# Altium PCB Frontend.PcbDoc
Units mm, origin at the board's own origin, x right, y up, seen from the top; angles counter-clockwise.
Board outline 50 x 80 mm, 4 copper layers (Top Layer, Mid Layer 1, Mid Layer 2, Bottom Layer), stack 1.57 mm thick; 49 components, 38 nets, 189 pads, 418 vias.
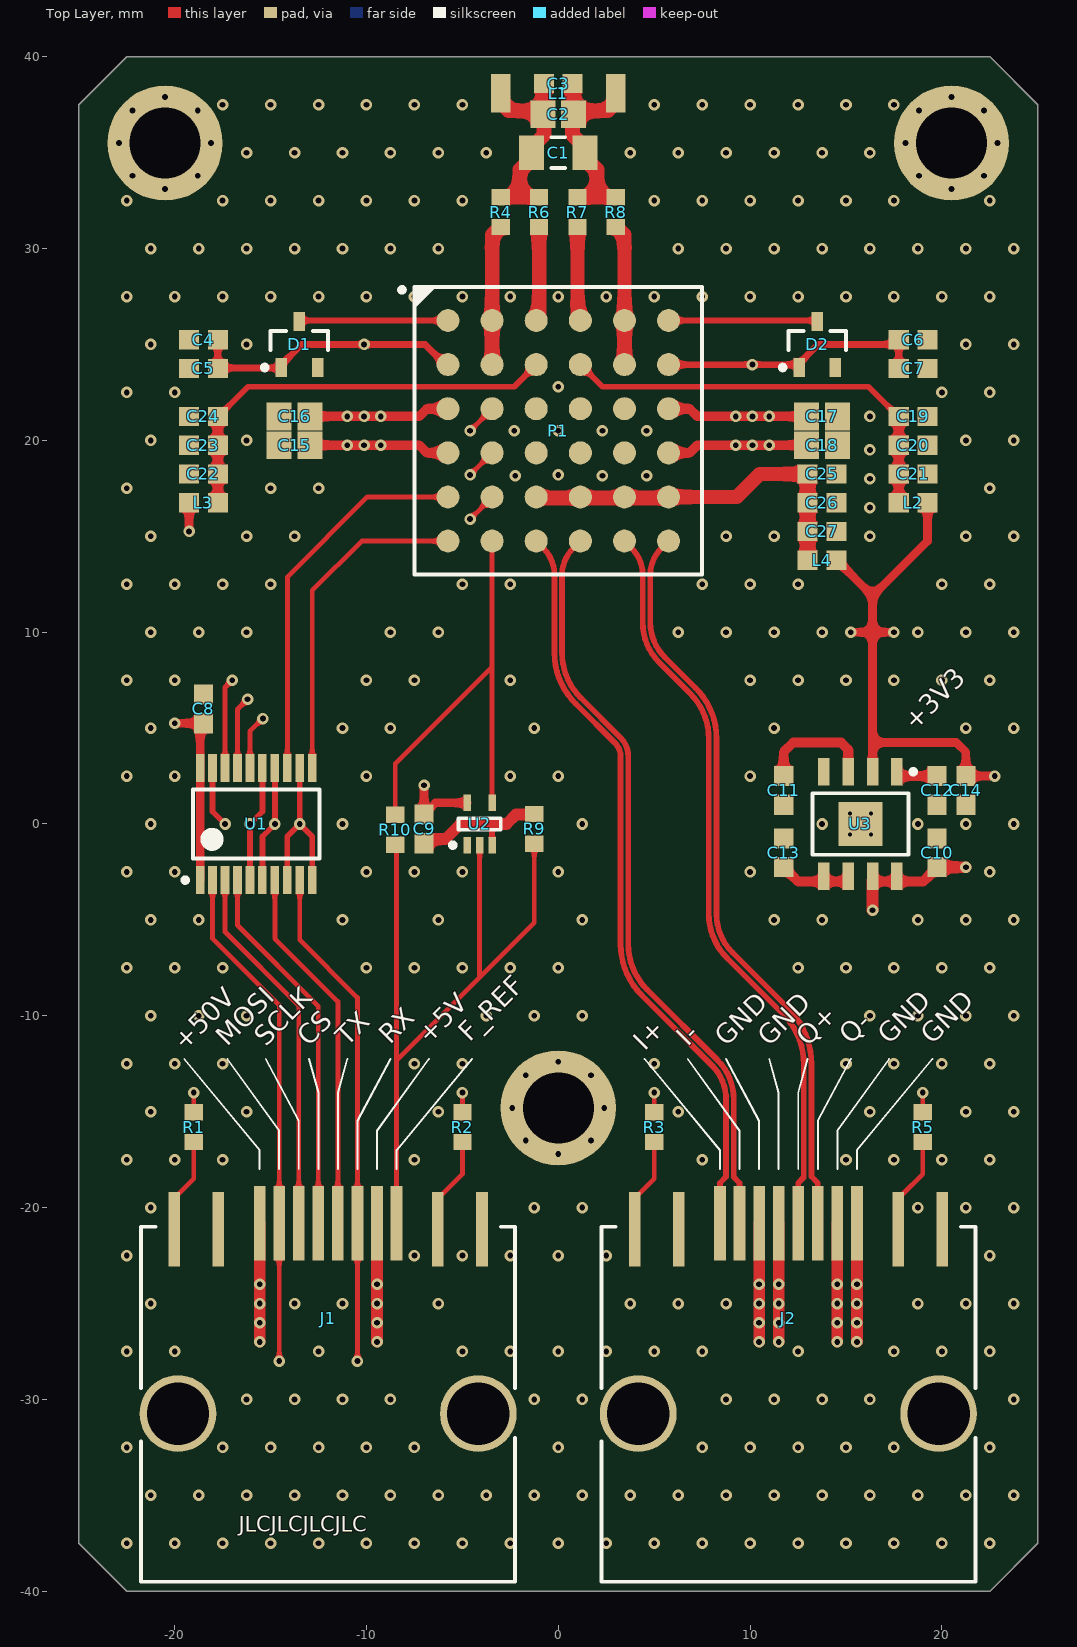
[diagram p0: Top Layer view]
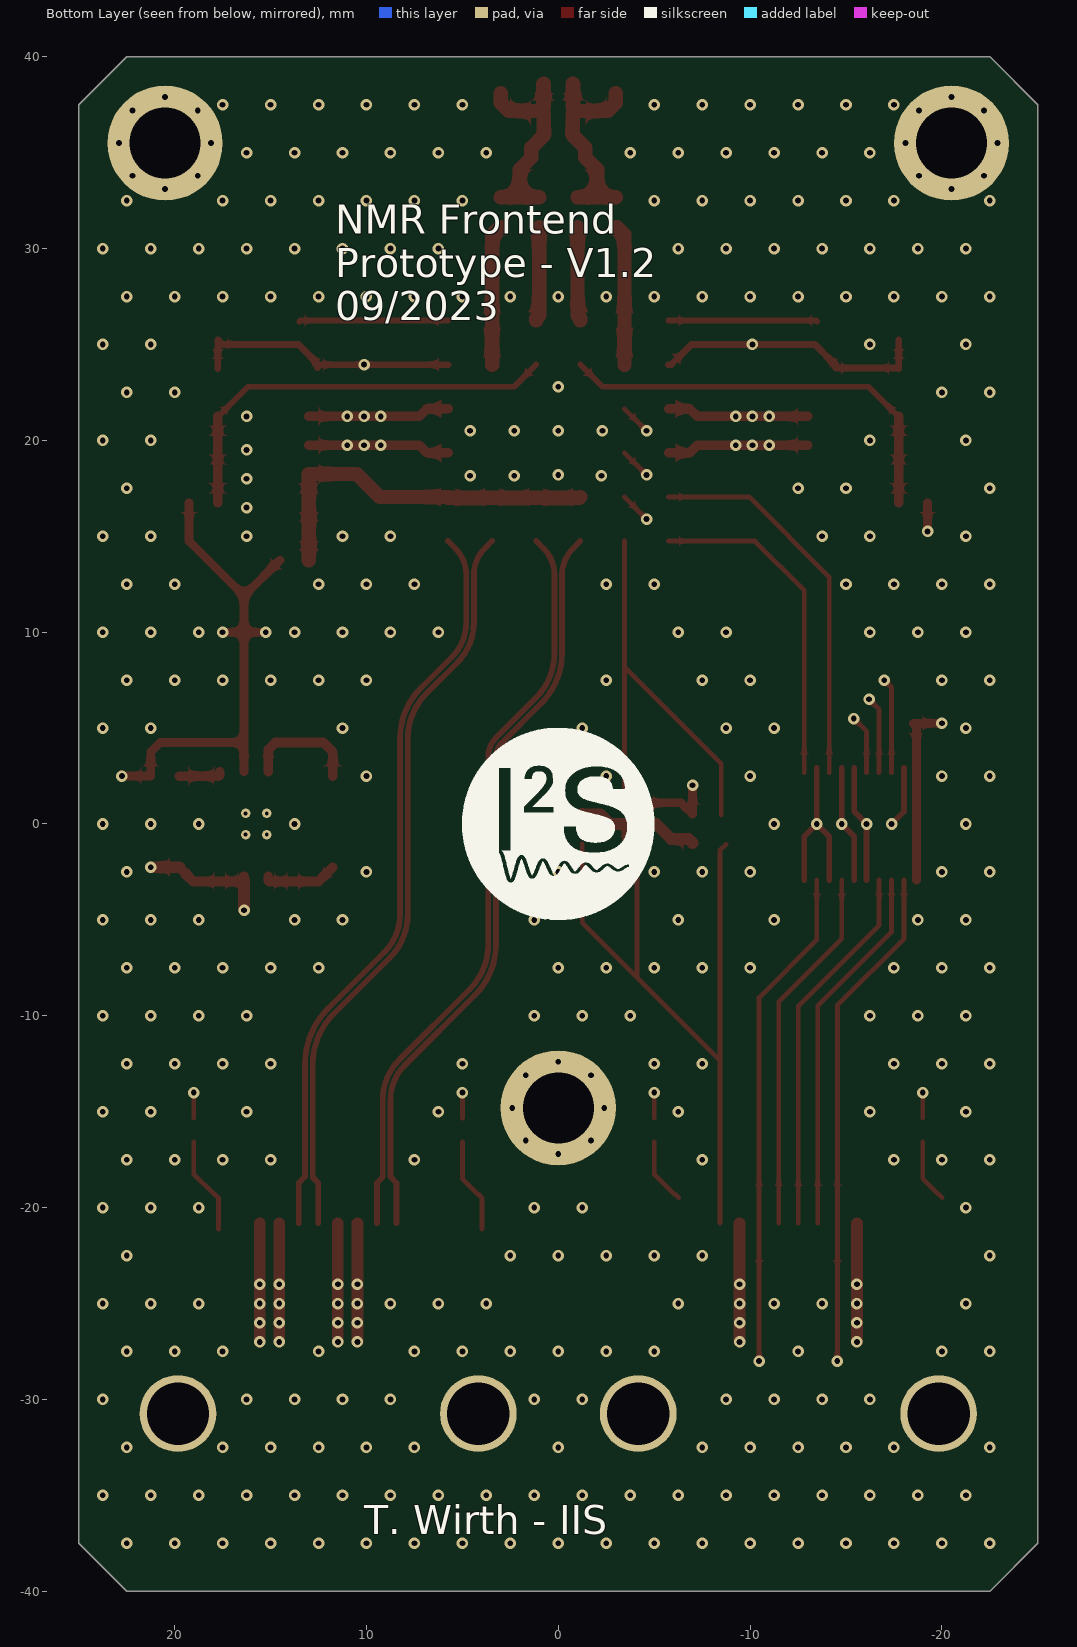
[diagram p1: Bottom Layer view, seen from below]
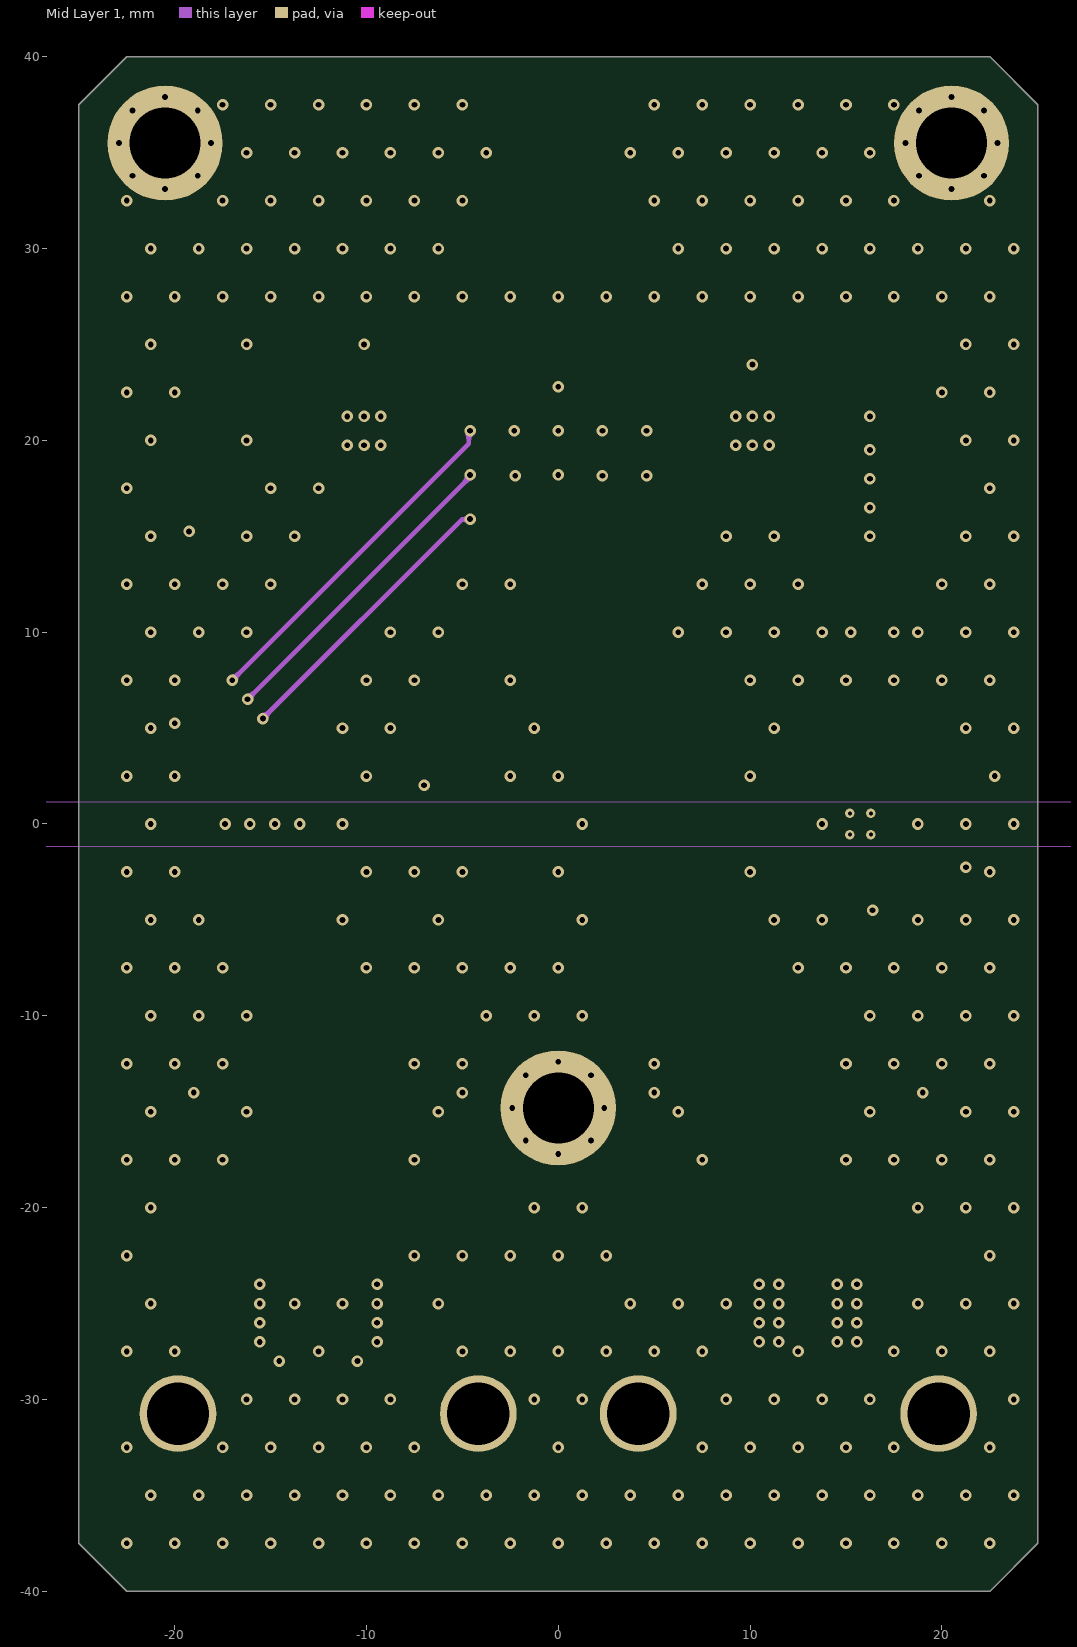
[diagram p2: Mid Layer 1]
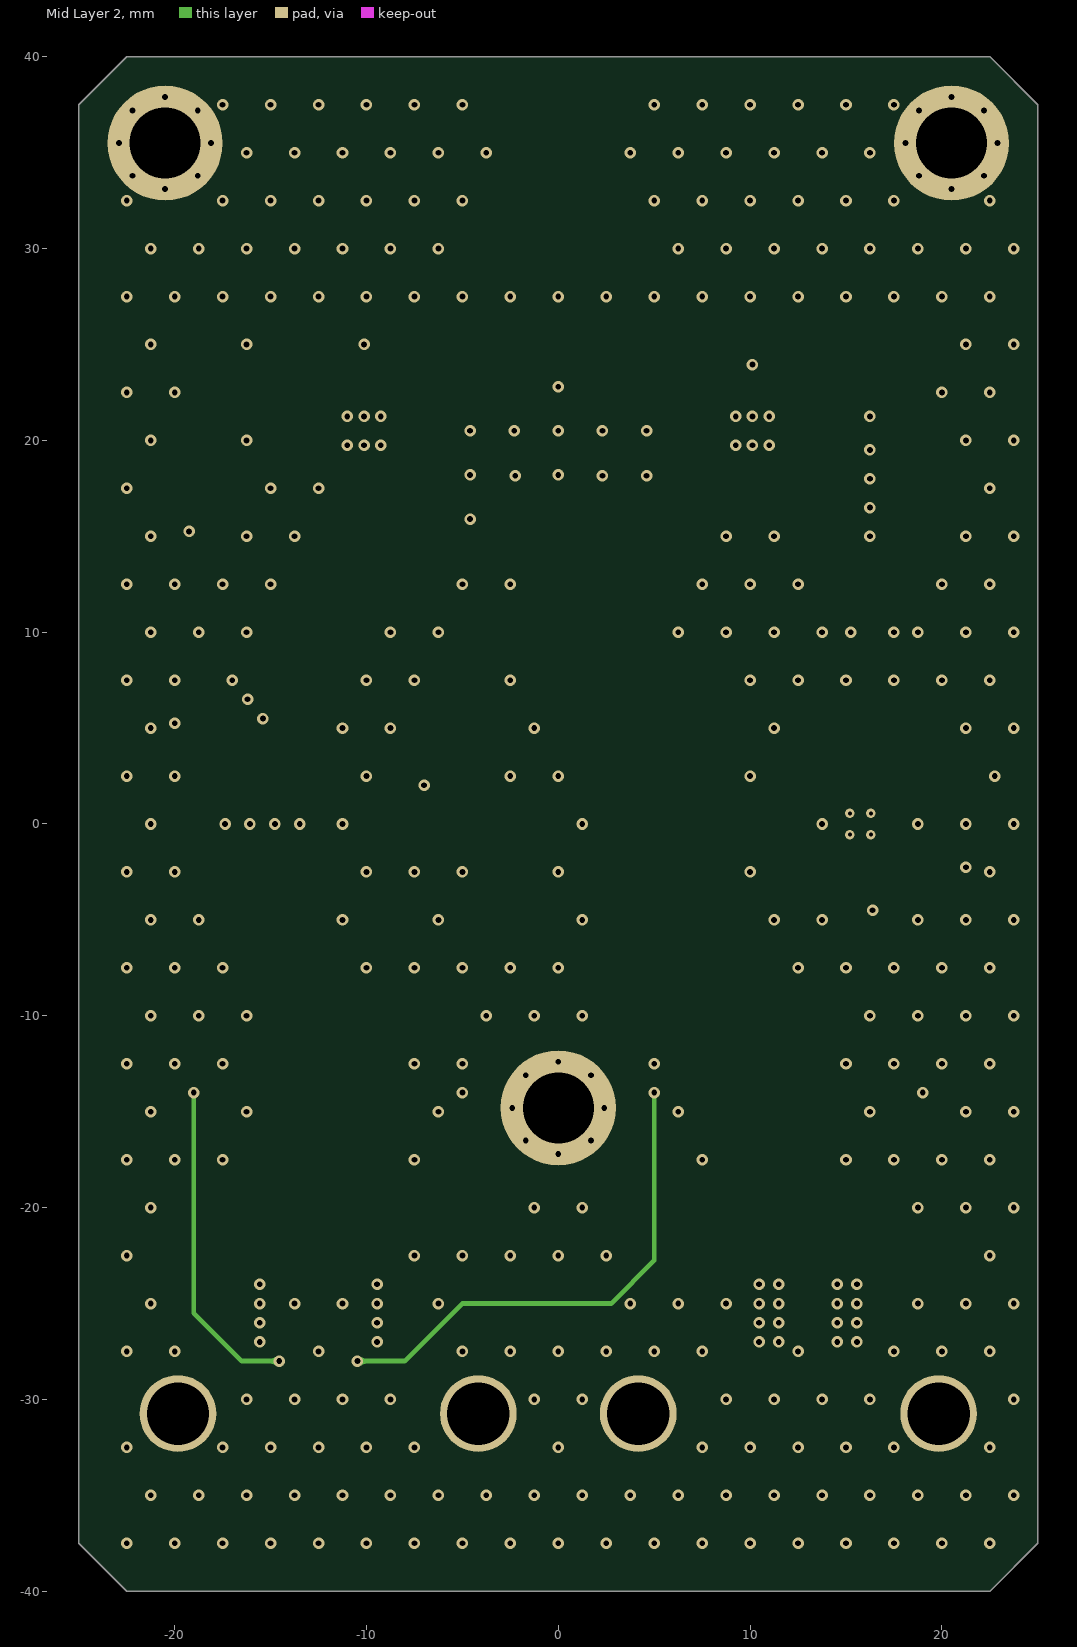
[diagram p3: Mid Layer 2]
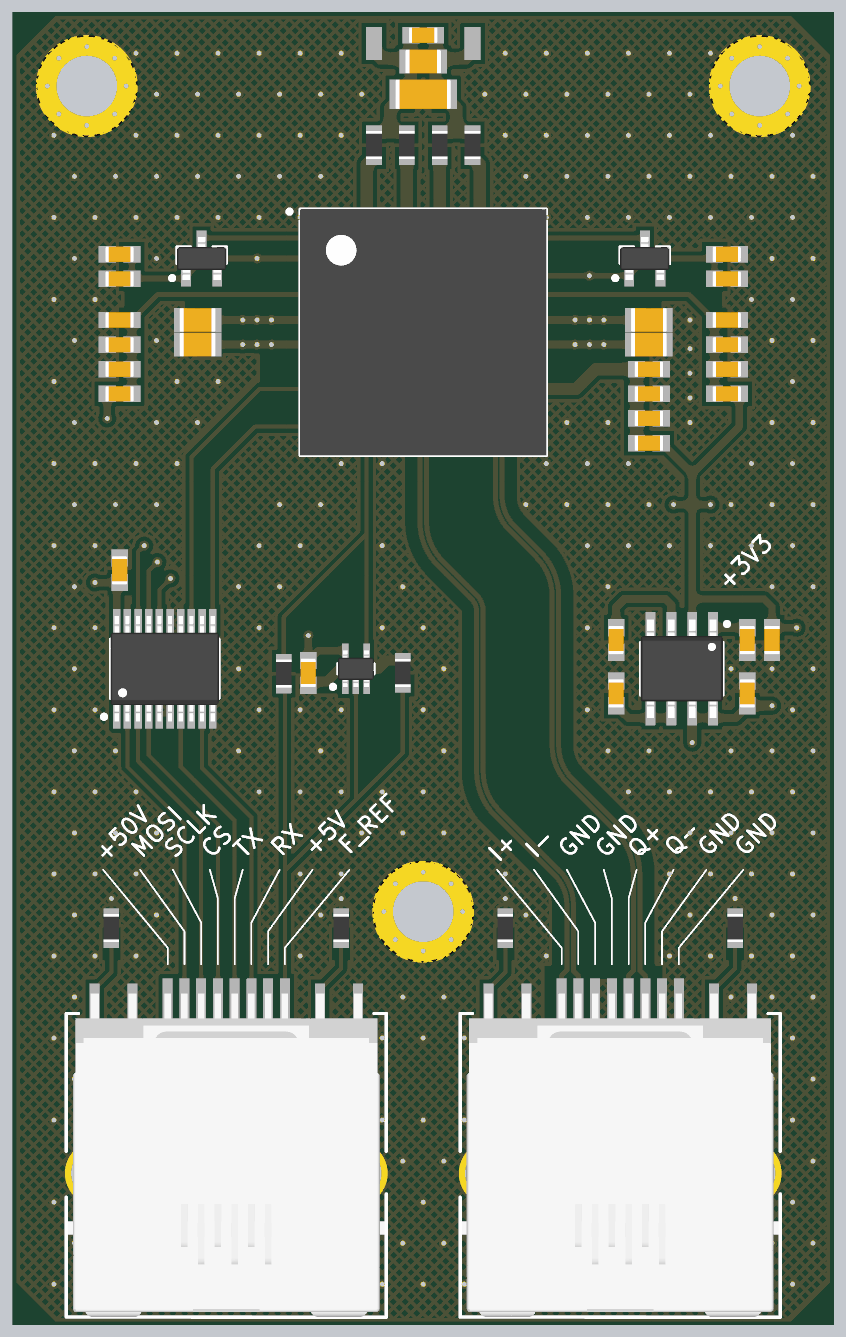
[diagram p4: 3D render of the assembled board from above, using the file's embedded part models]

## Layer stack, top to bottom
Top Solder: solder mask 0.0127, Solder Resist, Dk 3.8
Top Layer: signal copper 0.035
Dielectric 1: prepreg 0.1, 2313, Dk 4.05
Mid Layer 1: signal copper 0.0175
Core: core 1.265, FR-4, Dk 4.5
Mid Layer 2: signal copper 0.0175
Dielectric 2: prepreg 0.1, 2313, Dk 4.05
Bottom Layer: signal copper 0.035
Bottom Solder: solder mask 0.0127, Solder Resist, Dk 3.8

## Board outline
-25,-37.5 -22.5,-40 22.5,-40 25,-37.5 25,37.5 22.5,40 -22.5,40 -25,37.5

## Design rules (kind name [scope] priority, off if disabled: settings)
BoardOutlineClearance [All] p1: gap=0.2 ignorepadtopadclearanceinfootprint=FALSE
Clearance Clearance_IQ [InNetClass('IQ')] p1: gap=0.102 ignorepadtopadclearanceinfootprint=FALSE except(0.09: Arc-Arc Arc-Track Track-Track; 0.127: SMDPad-SMDPad THPad-Via Via-Fill Via-Region Via-Text; 0.2: Arc-SMDPad Track-SMDPad; 0.254: Arc-Via Arc-Hole Track-Via Track-Hole SMDPad-Via SMDPad-Hole THPad-Hole Via-Via Via-Hole Fill-Hole Poly-Hole Region-Hole Text-Hole; 0.33: Arc-THPad Track-THPad SMDPad-THPad THPad-THPad; 0.75: Arc-Poly Track-Poly SMDPad-Poly THPad-Poly Via-Poly Fill-Poly Poly-Poly)
Clearance [All] p2: gap=0.102 ignorepadtopadclearanceinfootprint=FALSE except(0.09: Arc-Arc Arc-Track Track-Track; 0.127: SMDPad-SMDPad THPad-Via Via-Fill Via-Region Via-Text; 0.2: Arc-SMDPad Track-SMDPad; 0.25: Arc-Poly Track-Poly SMDPad-Poly THPad-Poly Via-Poly Fill-Poly Poly-Poly; 0.254: Arc-Via Arc-Hole Track-Via Track-Hole SMDPad-Via SMDPad-Hole THPad-Hole Via-Via Via-Hole Fill-Hole Poly-Hole Region-Hole Text-Hole; 0.33: Arc-THPad Track-THPad SMDPad-THPad THPad-THPad)
ComponentClearance [All] p1: gap=0.102 collisioncheckmode=3 verticalgap=0.102 showdistances=TRUE
DiffPairsRouting [InDifferentialPairClass('IQ')] p1: maxlimit=2 minlimit=0.09 mostfreqgap=0.1 toplayer_minwidth=0.09 toplayer_maxwidth=6 toplayer_prefwidth=0.3 midlayer1_minwidth=0.09 midlayer1_maxwidth=6 midlayer1_prefwidth=0.3 midlayer2_minwidth=0.09 midlayer2_maxwidth=6 midlayer2_prefwidth=0.3 bottomlayer_minwidth=0.09 bottomlayer_maxwidth=6 bottomlayer_prefwidth=0.3 maxuncoupledlength=12.7
Height [All] p1: minheight=0 maxheight=1816.048 prefheight=12.7
HoleSize [All] p1: absolutevalues=TRUE maxlimit=6.3 minlimit=0.2 maxpercent=80.000 minpercent=20.000
HoleToHoleClearance [All] p1: gap=0.5 allowstackedmicrovias=FALSE
MinimumAnnularRing [All] p1: minimumring=0.13
MinimumSolderMaskSliver [All] p1: minsoldermaskwidth=0.13
PlaneClearance [All] p1: clearance=0.102
PlaneConnect PlaneConnectPowerPads [InPadClass('PowerPads')] p1: planeconnectstyle=Direct reliefexpansion=0.508 reliefentries=4 reliefconductorwidth=0.254 reliefairgap=0.254
PlaneConnect [All] p2: pad.planeconnectstyle=Relief pad.reliefexpansion=0.3 pad.reliefentries=4 pad.reliefconductorwidth=0.102 pad.reliefairgap=0.102 via.planeconnectstyle=Direct via.reliefexpansion=0.3 via.reliefentries=4 via.reliefconductorwidth=0.127 via.reliefairgap=0.127
PolygonConnect PolygonConnectPowerPads [All vs (InPadClass('PowerPads'))] p1: connectstyle=Direct reliefconductorwidth=0.254 reliefentries=4 polygonreliefangle="90 Angle" airgapwidth=0.254
PolygonConnect [All] p2: connectstyle=Direct reliefconductorwidth=0.102 reliefentries=4 polygonreliefangle="90 Angle" airgapwidth=0.102
RoutingVias [All] p1: holewidth=0.3 width=0.45 viastyle="Through Hole" minholewidth=0.15 minwidth=0.25 maxholewidth=6.3 maxwidth=6.55
SilkToSilkClearance [All] p1: silktosilkclearance=0.15
SilkToSolderMaskClearance [IsPad] p1: minsilkscreentomaskgap=0.15 clearancetoexposedcopper=TRUE
SolderMaskExpansion [All] p1: expansion=0 istentingtop=FALSE
Width [All] p1: maxlimit=1816.048 minlimit=0.09 preferedwidth=0.102
20 further rules are at their usual default settings.

## Classes and differential pairs
differential pair class IQ: I Q
net class IQ: I_N I_P Q_N Q_P
component class Power: C10 C11 C12 C13 C14 C15 C16 C17 C18 C19 C20 C21 C22 C23 C24 C25 C26 C27 L2 L3 L4 U3
component class Frontend: C1 C2 C3 C4 C5 C6 C7 C8 C9 D1 D2 J1 J2 L1 P1 R1 R2 R3 R4 R5 R6 R7 R8 R9 R10 U1 U2
differential pair Q: +Q_P -Q_N
differential pair I: +I_P -I_N

## Components (designator, comment, footprint, x,y, rotation, side; value= is the part's Value field where it differs from the comment)
C1 "tune" CAP_1206 0,35 r0 top
C2 "tune" CAP_0805 0,37 r0 top
C3 "tune" CAP_0603 0,38.6 r0 top
C4 "100n" CAP_0603 -18.5,25.25 r180 top
C5 "100p" CAP_0603 -18.5,23.75 r180 top
C6 "100n" CAP_0603 18.5,25.25 r0 top
C7 "100p" CAP_0603 18.5,23.75 r0 top
C8 "100n" CAP_0603 -18.5,6 r90 top
C9 "100n" CAP_0603 -7,-0.25 r270 top
C10 "10u" CAP_0603 19.75,-1.5 r90 top
C11 "22u / 10u" CAP_0603 11.75,1.75 r270 top
C12 "10u" CAP_0603 19.75,1.75 r270 top
C13 "10u" CAP_0603 11.75,-1.5 r90 top
C14 "10u" CAP_0603 21.25,1.75 r270 top
C15 "10u" CAP_0805 -13.75,19.75 r180 top
C16 "10u" CAP_0805 -13.75,21.25 r180 top
C17 "10u" CAP_0805 13.75,21.25 r0 top
C18 "10u" CAP_0805 13.75,19.75 r0 top
C19 "1u" CAP_0603 18.5,21.25 r0 top
C20 "100n" CAP_0603 18.5,19.75 r0 top
C21 "100p" CAP_0603 18.5,18.25 r0 top
C22 "1u" CAP_0603 -18.5,18.25 r180 top
C23 "100n" CAP_0603 -18.5,19.75 r180 top
C24 "100p" CAP_0603 -18.5,21.25 r180 top
C25 "1u" CAP_0603 13.75,18.25 r0 top
C26 "100n" CAP_0603 13.75,16.75 r0 top
C27 "100p" CAP_0603 13.75,15.25 r0 top
D1 "BAR66E6327HTSA1" SOT23 -13.5,25 r90 top
D2 "BAR66E6327HTSA1" SOT23 13.5,25 r90 top
J1 "RJ45" "RJ45 - RJE3A1880412" -12,-30 r0 top
J2 "RJ45" "RJ45 - RJE3A1880412" 12,-30 r0 top
L1 "NMR" NMR-Coil-Pads 0,38.1 r0 top
L2 "1k" CAP_0603 18.5,16.75 r180 top
L3 "1k" CAP_0603 -18.5,16.75 r0 top
L4 "1k" CAP_0603 13.75,13.75 r180 top
P1 "6 by 6 BGA" "BGA36C230P6X6_1500X1500X190 - Interposer" 0,20.5 r0 top
R1 "68R" RES_0603 -19,-15.8 r270 top
R2 "150R" RES_0603 -5,-15.8 r90 top
R3 "68R" RES_0603 5,-15.8 r270 top
R4 "" RES_0603 -3,31.9 r270 top value="0 [] inf"
R5 "2k4" RES_0603 19,-15.8 r90 top
R6 "" RES_0603 -1,31.9 r270 top value="0 [] inf"
R7 "" RES_0603 1,31.9 r270 top value="0 [] inf"
R8 "" RES_0603 3,31.9 r270 top value="0 [] inf"
R9 "" RES_0603 -1.25,-0.25 r270 top value=69R8
R10 "" RES_0603 -8.5,-0.3 r270 top value="0 [] inf"
U1 "BusTransceiver" TSSOP-20 -15.75,0 r90 top
U2 "NC7SV04P5X" SOT23-65P210X110-5N -4.1,0 r90 top
U3 "ADM7154ARDZ-3.3-R7" SOIC-8_TP 15.75,0 r270 top

## Footprints (in the part's own frame and the unit in brackets; to place one, negate y for a bottom-side part, rotate by r counter-clockwise, add the part's x,y. Pads: shape width x height; smd on the part's side, far side on the other; paste and mask are expansions set on the pad)
"BGA36C230P6X6_1500X1500X190 - Interposer" [mm] "BGA, 36-Leads, Body 15,00x15,00mmx1,90mm, Pitch 2,30mm"
  round 1.2 smd: A1(-5.75,5.75) A2(-3.45,5.75) A3(-1.15,5.75) A4(1.15,5.75) A5(3.45,5.75) A6(5.75,5.75) B1(-5.75,3.45) B2(-3.45,3.45) B3(-1.15,3.45) B4(1.15,3.45) B5(3.45,3.45) B6(5.75,3.45) C1(-5.75,1.15) C2(-3.45,1.15) C3(-1.15,1.15) C4(1.15,1.15) C5(3.45,1.15) C6(5.75,1.15) D1(-5.75,-1.15) D2(-3.45,-1.15) D3(-1.15,-1.15) D4(1.15,-1.15) D5(3.45,-1.15) D6(5.75,-1.15) E1(-5.75,-3.45) E2(-3.45,-3.45) E3(-1.15,-3.45) E4(1.15,-3.45) E5(3.45,-3.45) E6(5.75,-3.45) F1(-5.75,-5.75) F2(-3.45,-5.75) F3(-1.15,-5.75) F4(1.15,-5.75) F5(3.45,-5.75) F6(5.75,-5.75)
  silkscreen extent -8.27,-7.5 7.5,7.5, body extent -7.5,-7.5 7.5,7.5, height 1.9
CAP_0603 [mm] "Chip Capacitor, 2-Leads, Body 1,60x0,80mm, IPC Medium Density"
  rect 1.05x1 smd: 1(-0.75,0) 2(0.75,0)
  body extent -0.87,-0.48 0.87,0.48, height 0.85
CAP_0805 [mm] "Chip Capacitor, 2-Leads, Body 2,00x1,25mm, IPC Medium Density"
  rect 1.3x1.45 smd: 1(-0.8,0) 2(0.8,0)
  body extent -1.1,-0.72 1.1,0.72, height 1.1
CAP_1206 [mm] "Chip Capacitor, 2-Leads, Body 3,20x1,60mm, IPC Medium Density"
  rect 1.3x1.8 smd: 1(-1.4,0) 2(1.4,0)
  silkscreen extent -0.35,-0.8 0.35,0.8, body extent -1.7,-0.9 1.7,0.9, height 1.5
NMR-Coil-Pads [mm] "Pads to solder an NMR coil"
  rect 1x2 smd: 1(-3,0) 2(3,0)
RES_0603 [mm] "Chip Resistor, 2-Leads, Body 1,60x0,83mm, IPC Medium Density"
  rect 0.85x0.95 smd: 1(-0.775,0) 2(0.775,0)
  body extent -0.85,-0.48 0.85,0.48, height 0.6
"RJ45 - RJE3A1880412" [mm] "Ethernet Port (RJ45)"
  rect 0.61x3.9 smd: 1(3.57,9.19) 2(2.55,9.19) 3(1.53,9.19) 4(0.51,9.19) 5(-0.51,9.19) 6(-1.53,9.19) 7(-2.55,9.19) 8(-3.57,9.19) A1(8.02,8.87) A2(5.72,8.87) A3(-5.72,8.87) A4(-8.02,8.87)
  round 4 hole 3.25: MH1(7.83,-0.74) MH2(-7.83,-0.74)
  silkscreen extent -9.75,-9.51 9.75,9, body extent -9.65,-9.5 9.65,10.2, height 13.3
SOIC-8_TP [mm] "SOIC, 8-Leads, Body 4,90x3,90mm, Pitch 1,27mm, Thermal Pad 2,30x2,30mm, IPC Medium Density"
  rect 2.3x2.3 smd: 0(0,0)
  rect 1.45x0.6 smd: 1(-2.725,1.905) 2(-2.725,0.635) 3(-2.725,-0.635) 4(-2.725,-1.905) 5(2.725,-1.905) 6(2.725,-0.635) 7(2.725,0.635) 8(2.725,1.905)
  silkscreen extent -2.85,-2.5 1.6,2.88, body extent -3,-2.5 3,2.5, height 1.75
SOT23 [mm] "SOT23, 3-Leads, Body 2,90x2,45mm, Pitch 0,95mm, IPC Medium Density"
  rect 1x0.6 smd: 1(-1.2,0.95) 2(-1.2,-0.95) 3(1.2,0)
  silkscreen extent -1.32,-1.5 0.7,1.92, body extent -1.3,-1.5 1.3,1.5, height 1.1
SOT23-65P210X110-5N [mm] "SOT23, 5-Leads, Body 2,00x2,10mm, Pitch 0,65mm, IPC Medium Density"
  rect 0.85x0.4 smd: 1(-1.1,0.65) 2(-1.1,0) 3(-1.1,-0.65) 4(1.1,-0.65) 5(1.1,0.65)
  silkscreen extent -1.22,-1.1 0.3,1.52, body extent -1.15,-1.1 1.15,1.1, height 1.1
TSSOP-20 [mm] "TSOP, 20-Leads, Body 6,50x4,35mm, Pitch 0,65mm, IPC Medium Density"
  rect 1.45x0.45 smd: 1(-2.925,2.925) 2(-2.925,2.275) 3(-2.925,1.625) 4(-2.925,0.975) 5(-2.925,0.325) 6(-2.925,-0.325) 7(-2.925,-0.975) 8(-2.925,-1.625) 9(-2.925,-2.275) 10(-2.925,-2.925) 11(2.925,-2.925) 12(2.925,-2.275) 13(2.925,-1.625) 14(2.925,-0.975) 15(2.925,-0.325) 16(2.925,0.325) 17(2.925,0.975) 18(2.925,1.625) 19(2.925,2.275) 20(2.925,2.925)
  silkscreen extent -3.05,-3.3 1.8,3.82, body extent -3.2,-3.3 3.2,3.3, height 1.2

## Part data
C1 C2 C3 C4 C5 C6 C7 C8 C9 C10 C11 C12 C13 C14 C15 C16 C17 C18 C19 C20 C21 C22 C23 C24 C25 C26 C27: library part Cap
D1 D2: library part Diode_series, "SMP1320-075LF (SC-70) / BAV99 (SOT23)"
J1 J2: "Ethernet Connectors RJ45 SMT"
L1: library part Ind
L2 L3 L4: library part FerriteBead
P1: library part BGA_6x6
R1 R2 R3 R4 R5 R6 R7 R8 R9 R10: library part Res
U1: library part 74LVC245A
U3: library part ADM715X

## Free pads (board coordinates)
  round 6 hole 3.7 mask+0.102: 0(-20.5,35.5) 0(0,-14.8) 0(20.5,35.5)

## Via types
v1: diameter 0.6, hole 0.3, Top Layer to Bottom Layer, tented both sides, 414 vias
v2: diameter 0.5, hole 0.2, Top Layer to Bottom Layer, tented both sides, 4 vias

## Nets (pads, with @x,y where several pads share a name; then routed paths per layer and width w, separated by ;. In a path a pad name is that pad's centre, name@x,y a point inside that pad or via, vN(x,y) a via of type N, cw(c..) or ccw(c..) an arc to the next point about the centre after c; other vN are vias at no path point)
+3V3: C4.1 C5.1 C6.1 C7.1 C8.1 C9.1 C14.1 D1.1 D2.1 L2.1 L3.1 L4.1 P1.B1 P1.B6 U1.1 U1.20 U2.5 U3.2 | length 72
  Top Layer w0.35: C4.1 C5.1 -17.725,23.775 -14.475,23.775 D1.1 -14.45,24 -14.325,24.125 -14.255,24.125 -13.38,25 -6.941,25 -5.891,23.95 P1.B1 ; P1.B6 12.425,23.95 D2.1@12.55,23.825 ; D2.1 D2.1@12.55,23.825 ; C7.1 C6.1 17.5,25 13.55,25 12.55,24 D2.1@12.55,23.825
  Top Layer w0.45: v1(-20,5.25) C8.1 -18.675,5.075 U1.20 U1.1 ; v1(-19.25,15.25) L3.1 ; C9.1 C9.1@-7,0.525 ; v1(-7,2.025) C9.1@-7,0.525 ; U2.5 -6.4,1.1 -6.7,0.8 -6.725,0.8 C9.1@-7,0.525 ; L4.1 14.525,13.75 16.385,11.89 ; v1(15.25,10) 16.385,10 ; U3.2 16.385,4.25 ; v1(17.5,10) 16.385,10 ; L2.1 19.25,14.755 16.385,11.89 ; v1(22.75,2.5) C14.1 21.25,3.75 20.75,4.25 16.385,4.25 ; 16.385,4.25 16.385,10 ; 16.385,10 16.385,11.89
  other v1: 10.125,23.95 -10.125,25
+3V3_IC: C25.1 C26.1 C27.1 L4.2 P1.E3 P1.E4 P1.E5 P1.E6 | length 19.2
  Top Layer w0.75: P1.E3 -1.1,17 1.15,17 P1.E6@5.75,17 ; P1.E6 9.3,17.05 10.5,18.25 C25.1 C26.1 C27.1 L4.2
+5V: C10.1 J1.2 R2.2 U3.7 U3.8 | length 14.5
  Top Layer w0.25: R2.2@-5,-15.325 v1(-5,-14)
  Top Layer w0.5: U3.7 16.385,-2.95 16.435,-3 19.025,-3 19.75,-2.275 C10.1
  Top Layer w0.61: v1(-9.45,-27) v1(-9.45,-26) v1(-9.45,-25) v1(-9.45,-24) J1.2 ; v1(16.385,-4.5) U3.7@16.385,-2.95 ; C10.1 v1(21.25,-2.25)
+50V: C15.1 C16.1 C17.1 C18.1 J1.8 P1.C1 P1.C6 P1.D1 P1.D6 R5.2 | length 37.2
  Top Layer w0.25: R5.2@19,-15.325 v1(19,-14)
  Top Layer w0.5: C15.1@-13,19.75 v1(-10.125,19.75) -7.25,19.75 -6.85,19.35 P1.D1 ; C16.1@-13,21.25 v1(-10.125,21.25) -7.25,21.25 -6.85,21.65 P1.C1 ; P1.D6 6.85,19.35 7.25,19.75 v1(10.125,19.75) C18.1@13,19.75 ; P1.C6 6.85,21.65 7.25,21.25 v1(10.125,21.25) C17.1@13,21.25
  Top Layer w0.61: v1(-15.57,-27) v1(-15.57,-26) v1(-15.57,-25) v1(-15.57,-24) J1.8
  other v1: -11,19.75 -9.25,19.75 9.25,19.75 11,19.75 -11,21.25 -9.25,21.25 9.25,21.25 11,21.25
Coil_N: C1.2 C2.2 C3.2 L1.2 R7.1 R8.1 | length 11.5
  Top Layer w0.75: C3.2 0.775,38.575 C2.2@0.775,37.025 ; R7.1 2.025,32.675 ; R8.1 2.025,32.675 ; L1.2 3,37.6 2.575,37.175 0.925,37.175 C2.2@0.775,37.025 ; C2.2@0.775,37.025 C2.2 0.75,36.95 0.75,35.9 1.4,35.25 1.4,34.75 2.025,34.125 2.025,32.675
Coil_P: C1.1 C2.1 C3.1 L1.1 R4.1 R6.1 | length 11.5
  Top Layer w0.75: R4.1 -2.025,32.675 ; L1.1 -3,37.6 -2.575,37.175 -0.925,37.175 C2.1@-0.775,37.025 ; R6.1 -2.025,32.675 ; C3.1 -0.775,38.575 C2.1@-0.775,37.025 ; -2.025,32.675 -2.025,34.125 -1.4,34.75 -1.4,35.25 -0.75,35.9 -0.75,36.95 C2.1 C2.1@-0.775,37.025
FREF: J1.1 R9.2 R10.2 U2.2 | length 41
  Top Layer w0.25: R10.2@-8.75,-1.075 -8.73,-1.075 -8.43,-1.375 -8.43,-12.32 ; J1.1 -8.43,-12.32 ; U2.2 -4.1,-7.99 ; R9.2 -1.25,-5.14 -4.1,-7.99 ; -8.43,-12.32 -4.1,-7.99
FREF_BUFF: P1.F2 R10.1 U2.4 | length 23.5
  Top Layer w0.25: R10.1 -8.5,3.15 -3.45,8.2 ; U2.4 -3.45,8.2 ; P1.F2 -3.45,8.2
GND: C4.2 C5.2 C6.2 C7.2 C8.2 C9.2 C10.2 C11.2 C12.2 C13.2 C14.2 C15.2 C16.2 C17.2 C18.2 C19.2 C20.2 C21.2 C22.2 C23.2 C24.2 C25.2 C26.2 C27.2 J1.A1 J1.A3 J1.MH1 J1.MH2 J2.1 J2.2 J2.5 J2.6 J2.A1 J2.A3 J2.MH1 J2.MH2 P1.C3 P1.C4 P1.C5 P1.D3 P1.D4 P1.D5 pad.0 R9.1 U1.5 U1.6 U1.8 U1.10 U1.12 U1.14 U1.15 U1.19 U2.3 U3.0 U3.4 | length 57
  Top Layer w0.25: U2.3 -3.45,0
  Top Layer w0.3: U1.19 -18.025,0.65 v1(-17.375,0) ; U1.5 v1(-16.075,0) -15.425,0.65 U1.15 ; U1.6 -15.425,-0.65 v1(-14.775,0) U1.14 ; U1.8 -14.125,-0.65 v1(-13.475,0) ; U1.12 v1(-13.475,0) ; U1.10 -12.825,-0.65 v1(-13.475,0)
  Top Layer w0.61: C9.2 -7,-0.975 -6.805,-0.78 -5.88,-0.78 -5.1,0 -3.45,0 -2.7,0 -2.2,0.5 -1.275,0.5 R9.1 ; v1(10.47,-27) v1(10.47,-26) v1(10.47,-25) v1(10.47,-24) J2.6 ; v1(11.49,-27) v1(11.49,-26) v1(11.49,-25) v1(11.49,-24) J2.5 ; v1(14.55,-27) v1(14.55,-26) v1(14.55,-25) v1(14.55,-24) J2.2 ; v1(15.57,-27) v1(15.57,-26) v1(15.57,-25) v1(15.57,-24) J2.1
  other v1: -22.5,-37.5 -20,-37.5 -17.5,-37.5 -15,-37.5 -12.5,-37.5 -10,-37.5 -7.5,-37.5 -5,-37.5 -2.5,-37.5 0,-37.5 2.5,-37.5 5,-37.5 7.5,-37.5 10,-37.5 12.5,-37.5 15,-37.5 17.5,-37.5 20,-37.5 22.5,-37.5 -21.25,-35 -18.75,-35 -16.25,-35 -13.75,-35 -11.25,-35 -8.75,-35 -6.25,-35 -3.75,-35 -1.25,-35 1.25,-35 3.75,-35 6.25,-35 8.75,-35 11.25,-35 13.75,-35 16.25,-35 18.75,-35 21.25,-35 23.75,-35 -22.5,-32.5 -17.5,-32.5 -15,-32.5 -12.5,-32.5 -10,-32.5 -7.5,-32.5 0,-32.5 7.5,-32.5 10,-32.5 12.5,-32.5 15,-32.5 17.5,-32.5 22.5,-32.5 -16.25,-30 -13.75,-30 -11.25,-30 -8.75,-30 -1.25,-30 1.25,-30 8.75,-30 11.25,-30 13.75,-30 16.25,-30 23.75,-30 -22.5,-27.5 -20,-27.5 -12.5,-27.5 -5,-27.5 -2.5,-27.5 0,-27.5 2.5,-27.5 5,-27.5 7.5,-27.5 12.5,-27.5 17.5,-27.5 20,-27.5 22.5,-27.5 -21.25,-25 -13.75,-25 -11.25,-25 -6.25,-25 3.75,-25 6.25,-25 8.75,-25 18.75,-25 21.25,-25 23.75,-25 -22.5,-22.5 -7.5,-22.5 -5,-22.5 -2.5,-22.5 0,-22.5 2.5,-22.5 22.5,-22.5 -21.25,-20 -1.25,-20 1.25,-20 18.75,-20 21.25,-20 23.75,-20 -22.5,-17.5 -20,-17.5 -17.5,-17.5 -7.5,-17.5 7.5,-17.5 15,-17.5 17.5,-17.5 20,-17.5 22.5,-17.5 0,-17.2 -1.7,-16.5 1.7,-16.5 -21.25,-15 -16.25,-15 -6.25,-15 6.25,-15 16.25,-15 21.25,-15 23.75,-15 -2.4,-14.8 2.4,-14.8 -1.7,-13.1 1.7,-13.1 -22.5,-12.5 -20,-12.5 -17.5,-12.5 -7.5,-12.5 -5,-12.5 5,-12.5 15,-12.5 17.5,-12.5 20,-12.5 22.5,-12.5 0,-12.4 -21.25,-10 -18.75,-10 -16.25,-10 -3.75,-10 -1.25,-10 1.25,-10 16.25,-10 18.75,-10 21.25,-10 23.75,-10 -22.5,-7.5 -20,-7.5 -17.5,-7.5 -10,-7.5 -7.5,-7.5 -5,-7.5 -2.5,-7.5 0,-7.5 12.5,-7.5 15,-7.5 17.5,-7.5 20,-7.5 22.5,-7.5 -21.25,-5 -18.75,-5 -11.25,-5 -6.25,-5 1.25,-5 11.25,-5 13.75,-5 18.75,-5 21.25,-5 23.75,-5 -22.5,-2.5 -20,-2.5 -10,-2.5 -7.5,-2.5 -5,-2.5 0,-2.5 10,-2.5 22.5,-2.5 -21.25,0 -11.25,0 1.25,0 13.75,0 18.75,0 21.25,0 23.75,0 -22.5,2.5 -20,2.5 -10,2.5 -2.5,2.5 0,2.5 10,2.5 -21.25,5 -11.25,5 -8.75,5 -1.25,5 11.25,5 21.25,5 23.75,5 -22.5,7.5 -20,7.5 -10,7.5 -7.5,7.5 -2.5,7.5 10,7.5 12.5,7.5 15,7.5 17.5,7.5 20,7.5 22.5,7.5 -21.25,10 -18.75,10 -16.25,10 -8.75,10 -6.25,10 6.25,10 8.75,10 11.25,10 13.75,10 18.75,10 21.25,10 23.75,10 -22.5,12.5 -20,12.5 -17.5,12.5 -15,12.5 -5,12.5 -2.5,12.5 7.5,12.5 10,12.5 12.5,12.5 20,12.5 22.5,12.5 -21.25,15 -16.25,15 -13.75,15 8.75,15 11.25,15 16.25,15 21.25,15 23.75,15 16.25,16.5 -22.5,17.5 -15,17.5 -12.5,17.5 22.5,17.5 16.25,18 -2.25,18.15 2.3,18.15 4.6,18.15 0,18.2 16.25,19.5 -21.25,20 -16.25,20 21.25,20 23.75,20 -2.3,20.5 0,20.5 2.3,20.5 4.6,20.5 16.25,21.25 -22.5,22.5 -20,22.5 20,22.5 22.5,22.5 0,22.8 -21.25,25 -16.25,25 21.25,25 23.75,25 -22.5,27.5 -20,27.5 -17.5,27.5 -15,27.5 -12.5,27.5 -10,27.5 -7.5,27.5 -5,27.5 -2.5,27.5 0,27.5 2.5,27.5 5,27.5 7.5,27.5 10,27.5 12.5,27.5 15,27.5 17.5,27.5 20,27.5 22.5,27.5 -21.25,30 -18.75,30 -16.25,30 -13.75,30 -11.25,30 -8.75,30 -6.25,30 6.25,30 8.75,30 11.25,30 13.75,30 16.25,30 18.75,30 21.25,30 23.75,30 -22.5,32.5 -17.5,32.5 -15,32.5 -12.5,32.5 -10,32.5 -7.5,32.5 -5,32.5 5,32.5 7.5,32.5 10,32.5 12.5,32.5 15,32.5 17.5,32.5 22.5,32.5 -20.5,33.1 20.5,33.1 -22.2,33.8 -18.8,33.8 18.8,33.8 22.2,33.8 -16.25,35 -13.75,35 -11.25,35 -8.75,35 -6.25,35 -3.75,35 3.75,35 6.25,35 8.75,35 11.25,35 13.75,35 16.25,35 -22.9,35.5 -18.1,35.5 18.1,35.5 22.9,35.5 -22.2,37.2 -18.8,37.2 18.8,37.2 22.2,37.2 -17.5,37.5 -15,37.5 -12.5,37.5 -10,37.5 -7.5,37.5 -5,37.5 5,37.5 7.5,37.5 10,37.5 12.5,37.5 15,37.5 17.5,37.5 -20.5,37.9 20.5,37.9
  other v2: 15.2,-0.55 16.3,-0.55 15.2,0.55 16.3,0.55
I_N: J2.7 P1.F4 | length 39.2
  Top Layer w0.3: P1.F4 0.766,14.366 ccw(c2.131,13) 0.2,13 0.2,8.928 ccw(c3.54,8.928) 1.178,6.566 3.247,4.497 cw(c2.275,3.525) 3.65,3.525 3.65,-6.272 ccw(c6.99,-6.272) 4.628,-8.634 8.289,-12.294 cw(c6.21,-14.373) 9.15,-14.373 9.15,-18.41 9.45,-18.71 J2.7
I_P: J2.8 P1.F3 | length 39.2
  Top Layer w0.3: P1.F3 -0.766,14.366 cw(c-2.131,13) -0.2,13 -0.2,8.928 ccw(c3.54,8.928) 0.895,6.284 2.964,4.214 cw(c2.275,3.525) 3.25,3.525 3.25,-6.272 ccw(c6.99,-6.272) 4.345,-8.916 8.006,-12.577 cw(c6.21,-14.373) 8.75,-14.373 8.75,-18.39 8.43,-18.71 J2.8
LNA_N: P1.A4 R7.2 | length 4.9
  Top Layer w0.75: R7.2 1,26.522 1.15,26.372 P1.A4
LNA_P: P1.A3 R6.2 | length 4.9
  Top Layer w0.75: P1.A3 -1.15,26.372 -1,26.522 R6.2
NetC11_1: C11.1 U3.3 | length 6.1
  Top Layer w0.5: C11.1 11.75,3.75 12.25,4.25 14.75,4.25 15.115,3.885 U3.3
NetC12_1: C12.1 U3.1 | length 2.3
  Top Layer w0.5: U3.1 17.655,2.55 17.705,2.5 C12.1
NetC13_1: C13.1 U3.5 U3.6 | length 3.9
  Top Layer w0.5: C13.1 12.5,-3 15.065,-3 15.115,-2.95 U3.6
NetJ1_A2: J1.A2 R2.1 | length 3.5
  Top Layer w0.25: J1.A2@-6.28,-19.485 -6.1,-19.305 -6.055,-19.305 -5,-18.25 R2.1
NetJ1_A4: J1.A4 R1.2 | length 3.4
  Top Layer w0.25: J1.A4@-20.02,-19.485 -19.84,-19.305 -19.805,-19.305 -19,-18.5 R1.2
NetJ2_A2: J2.A2 R5.1 | length 5.1
  Top Layer w0.25: J2.A2 17.72,-19.485 17.9,-19.305 17.945,-19.305 19,-18.25 R5.1
NetJ2_A4: J2.A4 R3.2 | length 5
  Top Layer w0.25: J2.A4 3.98,-19.485 4.16,-19.305 4.195,-19.305 5,-18.5 R3.2
Q_N: J2.3 P1.F6 | length 38.9
  Top Layer w0.3: P1.F6 5.366,14.366 ccw(c6.731,13) 4.8,13 4.8,10.502 ccw(c7.34,10.502) 5.544,8.706 7.155,7.095 cw(c4.51,4.451) 8.25,4.451 8.25,-4.698 ccw(c11.092,-4.698) 9.08,-6.705 12,-9.625 cw(c9.103,-12.522) 13.2,-12.522 13.2,-18.38 13.53,-18.71 J2.3
Q_P: J2.4 P1.F5 | length 38.9
  Top Layer w0.3: P1.F5 3.834,14.366 cw(c2.469,13) 4.4,13 4.4,10.502 ccw(c7.34,10.502) 5.261,8.423 6.872,6.813 cw(c4.51,4.451) 7.85,4.451 7.85,-4.698 ccw(c11.092,-4.698) 8.799,-6.99 11.717,-9.908 cw(c9.103,-12.522) 12.8,-12.522 12.8,-18.42 12.51,-18.71 J2.4
RX: J1.3 R3.1 U1.9 | length 54
  Top Layer w0.25: U1.9 -13.475,-6.044 -10.47,-9.049 J1.3 v1(-10.47,-28) ; R3.1@5,-15.325 v1(5,-14)
  Mid Layer 2 w0.25: v1(-10.47,-28) -8,-28 -5,-25 2.75,-25 5,-22.75 v1(5,-14)
RX_BUFF: P1.F1 U1.11 | length 17.6
  Top Layer w0.25: U1.11@-12.825,2.675 U1.11 -12.825,12.175 -10.25,14.75 P1.F1
SPI_CLK: J1.6 U1.3 | length 19.5
  Top Layer w0.25: U1.3 -17.375,-5.625 -13.53,-9.47 J1.6
SPI_CLK_BUFF: P1.D2 U1.17 | length 22.2
  Top Layer w0.25: U1.17@-16.725,2.675 -16.725,5.975 v1(-16.2,6.5) ; v1(-4.6,18.2) P1.D2
  Mid Layer 1 w0.25: v1(-16.2,6.5) -4.667,18.033 -4.667,18.133 v1(-4.6,18.2)
SPI_CS: J1.5 U1.4 | length 19.6
  Top Layer w0.25: U1.4 -16.725,-5.275 -12.51,-9.49 J1.5
SPI_CS_BUFF: P1.E2 U1.16 | length 19.8
  Top Layer w0.25: U1.16@-16.075,2.675 U1.16 -16.075,4.825 v1(-15.4,5.5) ; v1(-4.6,15.9) P1.E2
  Mid Layer 1 w0.25: v1(-15.4,5.5) -5.027,15.873 -4.627,15.873 v1(-4.6,15.9)
SPI_DATA: J1.7 R1.1 U1.2 | length 44.8
  Top Layer w0.25: R1.1@-19,-15.325 v1(-19,-14) ; U1.2 -18.025,-5.975 -14.55,-9.45 J1.7 v1(-14.55,-28)
  Mid Layer 2 w0.25: v1(-19,-14) -19,-25.5 -16.5,-28 v1(-14.55,-28)
SPI_DATA_BUFF: P1.C2 U1.18 | length 24.7
  Top Layer w0.25: U1.18@-17.375,2.675 -17.375,7.125 v1(-17,7.5) ; v1(-4.6,20.5) P1.C2
  Mid Layer 1 w0.25: v1(-17,7.5) -4.667,19.833 -4.667,20.433 v1(-4.6,20.5)
TX: J1.4 U1.7 | length 19.2
  Top Layer w0.25: U1.7 -14.775,-5.975 -11.49,-9.26 J1.4
TX_BUFF: P1.E1 U1.13 | length 20.3
  Top Layer w0.25: U1.13@-14.125,2.675 U1.13 -14.125,12.875 -9.95,17.05 P1.E1
TX_OUT_N: P1.A5 P1.B5 R8.2 | length 7.4
  Top Layer w0.75: R8.2 3.05,31.125 3.45,30.725 P1.B5
TX_OUT_P: P1.A2 P1.B2 R4.2 | length 7.4
  Top Layer w0.75: P1.B2 P1.A2 -3.45,30.725 -3.05,31.125 R4.2
VDD_HS_extdiode_N: D2.3 P1.A6 | length 7.8
  Top Layer w0.3: P1.A6 13.45,26.25 D2.3
VDD_HS_extdiode_P: D1.3 P1.A1 | length 7.8
  Top Layer w0.3: D1.3 -13.45,26.25 P1.A1
VDD_LS_N: C19.1 C20.1 C21.1 L2.2 P1.B4 | length 22.2
  Top Layer w0.3: P1.B4 2.3,22.8 16.175,22.8 17.725,21.25 C19.1
  Top Layer w0.5: L2.2 C21.1 C20.1 C19.1
VDD_LS_P: C22.1 C23.1 C24.1 L3.2 P1.B3 | length 22.2
  Top Layer w0.3: C24.1 -17.725,21.25 -16.175,22.8 -2.3,22.8 P1.B3
  Top Layer w0.5: L3.2 C22.1 C23.1 C24.1
pads on no net: D1.2 D2.2 U2.1

## Polygon pours and split planes (outlines as drawn)
+5V on Mid Layer 1 "NONET_L-01_P-001" (hatched 45Degree grid 0.5 track 0.2, remove dead copper, shelved, pour order 12): -27.5,-42.5 -27.5,-1.151 27.5,-1.151 27.5,-42.5
+3V3 on Mid Layer 1 "NONET_L-01_P-001" (hatched 45Degree grid 0.5 track 0.2, remove dead copper, shelved, pour order 13): -27.5,42.5 -27.5,1.151 27.5,1.151 27.5,42.5
GND on Bottom Layer "NONET_L-01_P-001" (hatched 45Degree grid 0.5 track 0.2, remove dead copper, shelved, pour order 9): -27.5,42.5 27.5,42.5 27.5,-42.5 -27.5,-42.5
GND on Top Layer "NONET_L-01_P-001" (hatched 45Degree grid 0.5 track 0.2, remove dead copper, shelved, pour order 11): -27.5,42.5 27.5,42.5 27.5,-42.5 -27.5,-42.5
+50V on Mid Layer 2 "NONET_L-01_P-001" (hatched 45Degree grid 0.5 track 0.2, remove dead copper, shelved, pour order 10): -27.5,42.5 27.5,42.5 27.5,-42.5 -27.5,-42.5

## Other copper
Top Layer:
  pour cut-out: 18.2,21.7 18.2,23.3 18,23.3 18,21.7
  pour cut-out: -18.2,23.3 -18.2,21.7 -17.4,21.7 -17.4,23.3
  pour cut-out: -9.95,17.05 -9.95,19.55 -9.7,19.8 -9.65,19.75 -7.25,19.75 -6.85,19.35 -5.75,19.35 -5.75,17.05
  pour cut-out: 10.2,-18.9 11.7,-18.9 11.7,-18 10.2,-18
  pour cut-out: -14.5,21.25 -14.5,22.75 -5.75,22.75 -5.75,21.65 -6.85,21.65 -7.25,21.25
  pour cut-out: 5.75,21.65 6.85,21.65 7.25,21.25 14.5,21.25 14.5,22.75 5.75,22.75
  pour cut-out: -5.75,17.05 -9.95,17.05 -14.125,12.875 -14.125,2.925 -12.825,2.925 -12.825,12.175 -10.25,14.75 -5.75,14.75
  pour cut-out: -5.75,17.05 -5.75,22.75 -2.35,22.75 -3.45,21.65 -3.45,17.05
  pour cut-out: 5.75,17 5.75,21.65 6.85,21.65 7.25,21.25 13,21.25 13,18.25 10.5,18.25 9.3,17.05
  pour cut-out: 5.75,14.75 -5.75,14.75 -5.75,17.05 -1.15,17.05 1.15,17.05 5.75,17.05
  pour cut-out: -5.75,26.25 5.75,26.25 5.75,22.75 5.7,22.8 2.3,22.8 1.15,23.95 -1.15,23.95 -2.35,22.75 -5.75,22.75
  pour cut-out: 12.55,24 13.45,25 13.45,26.25 7.5,26.25 7.5,24
  pour cut-out: -13.45,25 -13.45,26.25 -7.5,26.25 -7.5,25
  pour cut-out: -14.775,-2.925 -13.475,-2.925 -13.475,-6.044 -13.544,-5.975 -14.775,-5.975
  pour cut-out: -16.725,-2.925 -14.775,-2.925 -14.775,-5.975 -15.4,-6.6 -16.725,-5.275
  pour cut-out: -4.955,1.525 -4.955,1.1 -6.4,1.1 -7,0.5 -7,-1 -6.5,-1.5 -4.1,-1.5 -4.1,-7.99 -1.3,-5.19 -1.3,0.5 -3.44,0.01 -3.479,1.521
Mid Layer 1:
  pour cut-out: -17,7.5 -15.4,5.5 -5.027,15.873 -4.627,15.873 -4.6,15.9 -4.667,15.967 -4.667,19.833

## Silkscreen, mask and mechanical layers (free items; w line width, h text height)
Top Overlay:
  lines w0.1: -19.5,-12.25 -15.57,-17 -15.57,-18 ; -17.25,-12.25 -14.55,-16 -14.55,-18 ; -15.25,-12.25 -13.53,-15.468 -13.53,-18 ; -13,-12.25 -12.51,-14 -12.51,-18 ; -11.49,-18 -11.49,-14 -11,-12.25 ; -10.47,-18 -10.47,-15.468 -8.75,-12.25 ; -9.45,-18 -9.45,-16 -6.75,-12.25 ; -8.43,-18 -8.43,-17 -4.5,-12.25 ; 4.5,-12.25 8.43,-17 8.43,-18 ; 6.75,-12.25 9.45,-16 9.45,-18 ; 8.75,-12.25 10.47,-15.468 10.47,-18 ; 11,-12.25 11.49,-14 11.49,-18 ; 12.51,-18 12.51,-14 13,-12.25 ; 13.53,-18 13.53,-15.468 15.25,-12.25 ; 14.55,-18 14.55,-16 17.25,-12.25 ; 15.57,-18 15.57,-17 19.5,-12.25
  text "+3V3" at 18.594,4.814 h1 r45
  text "F_REF" at -4.618,-11.413 h1 r45
  text "RX" at -8.75,-11.531 h1 r45
  text "+5V" at -6.75,-11.531 h1 r45
  text "Q-" at 15.25,-11.531 h1 r45
  text "GND" at 17.25,-11.531 h1 r45
  text "GND" at 19.5,-11.531 h1 r45
  text "MOSI" at -17.25,-11.631 h1 r45
  text "SCLK" at -15.25,-11.631 h1 r45
  text "CS" at -13,-11.631 h1 r45
  text "TX" at -11,-11.631 h1 r45
  text "I-" at 6.75,-11.631 h1 r45
  text "GND" at 8.75,-11.631 h1 r45
  text "GND" at 11,-11.631 h1 r45
  text "Q+" at 13,-11.631 h1 r45
  text "+50V" at -19.5,-11.881 h1 r45
  text "I+" at 4.5,-11.881 h1 r45
  text "JLCJLCJLCJLC" at -16.665,-36.9 h0.8
Bottom Overlay:
  region: 2300 vertices and 4 holes, not listed, extent -4.999,-4.999 5.001,5.001
  text "NMR Frontend / Prototype - V1.2 / 09/2023" at 11.621,26.266 h1.5
  text "T. Wirth - IIS" at 10.121,-37.025 h1.5
Outline:
  lines w0.05: -25,-37.5 -22.5,-40 22.5,-40 25,-37.5 25,37.5 22.5,40 20,40 -20,40 -22.5,40 -25,37.5 -25,-37.5